# EAGLE board 3x3 (EAGLE 7.2.0)

Size 100 x 226.1 mm. Coordinates in mm from the lower left corner, seen from the top.
Outline: 0,146.1 100,146.1 100,226.1 0,226.1 0,146.1
Copper layers (1*16): Top 0.035mm / dielectric 1.5mm / Bottom 0.035mm
Design rules "default": minimum track width 10mil, minimum drill 24mil, track to track 8mil, track to pad 8mil, pad to pad 8mil, via to via 8mil, smd to smd 8mil, copper to edge 40mil, drill to drill 8mil, minimum pad ring 10mil, minimum via ring 8mil, stop-mask expansion 4mil, vias tented up to drill 0mil, thermal gap 10mil

## Footprints (pad centres in the part's own frame; a part is rotated, then mirrored left to right if it is on the bottom)
SFH482 = drill 0.813 long: A -1.27,0; K 1.27,0
DIL16 = drill 0.813 long: 1 -8.89,-3.81; 2 -6.35,-3.81; 3 -3.81,-3.81; 4 -1.27,-3.81; 5 1.27,-3.81; 6 3.81,-3.81; 7 6.35,-3.81; 8 8.89,-3.81; 9 8.89,3.81; 10 6.35,3.81; 11 3.81,3.81; 12 1.27,3.81; 13 -1.27,3.81; 14 -3.81,3.81; 15 -6.35,3.81; 16 -8.89,3.81
TSOP17_TB1 = drill 1 pad 1.676: GND 0,-3.81; VO 0,3.81; VS 0,-1.27

## Placement (x,y rotation side)
D1  SFH482  [SFH482]  -6.35,2.59 0 top  (outside the outline)
D2  SFH482  [SFH482]  -16.51,2.59 0 top  (outside the outline)
D3  SFH482  [SFH482]  -26.67,2.59 0 top  (outside the outline)
D4  SFH482  [SFH482]  -36.83,2.59 0 top  (outside the outline)
D5  SFH482  [SFH482]  -46.99,2.59 0 top  (outside the outline)
D6  SFH482  [SFH482]  -57.15,2.59 0 top  (outside the outline)
D7  SFH482  [SFH482]  -67.31,2.59 0 top  (outside the outline)
D8  SFH482  [SFH482]  -77.47,2.59 0 top  (outside the outline)
D9  SFH482  [SFH482]  -87.63,2.59 0 top  (outside the outline)
IC1  74HC595N  [DIL16]  -77.47,-10.11 0 top  (outside the outline)
IC2  74HC595N  [DIL16]  -77.47,-22.81 0 top  (outside the outline)
IC3  74HC595N  [DIL16]  -77.47,-35.51 0 top  (outside the outline)
IC4  74HC595N  [DIL16]  -77.47,-48.21 0 top  (outside the outline)
IR1  TSOP1737TB1  [TSOP17_TB1]  21.59,138.48 0 top
IR2  TSOP1737TB1  [TSOP17_TB1]  21.59,121.97 0 top
IR3  TSOP1737TB1  [TSOP17_TB1]  21.59,105.46 0 top
IR4  TSOP1737TB1  [TSOP17_TB1]  21.59,88.95 0 top
IR5  TSOP1737TB1  [TSOP17_TB1]  21.59,72.44 0 top
IR6  TSOP1737TB1  [TSOP17_TB1]  21.59,55.93 0 top
IR7  TSOP1737TB1  [TSOP17_TB1]  21.59,39.42 0 top
IR8  TSOP1737TB1  [TSOP17_TB1]  21.59,22.91 0 top
IR9  TSOP1737TB1  [TSOP17_TB1]  21.59,6.4 0 top

## Library data of the parts
D1-D9 = led
IC1-IC4 = 74xx-eu
IR1-IR9 = telefunken; OC_FARNELL: unknown; OC_NEWARK: unknown

## Nets
GND: D1.K D2.K D3.K D4.K D5.K D6.K D7.K D8.K D9.K IC1.8 IC1.13 IC2.8 IC2.13 IC3.8 IC3.13 IC4.8 IC4.13 IR1.GND IR2.GND IR3.GND IR4.GND IR5.GND IR6.GND IR7.GND IR8.GND IR9.GND
VCC: IC1.16 IC2.16 IC3.16 IC4.16 IR1.VO IR2.VO IR3.VO IR4.VO IR5.VO IR6.VO IR7.VO IR8.VO IR9.VO
VS: IR1.VS IR2.VS IR3.VS IR4.VS IR5.VS IR6.VS IR7.VS IR8.VS IR9.VS

## Tracks (layer width: path | path; a pad name or v marks a point on that pad's centre or on a via)
GND  (25 unrouted)
VCC  (12 unrouted)
VS  (8 unrouted)